# EAGLE board 6820-differential-interface (EAGLE 8.2.2)
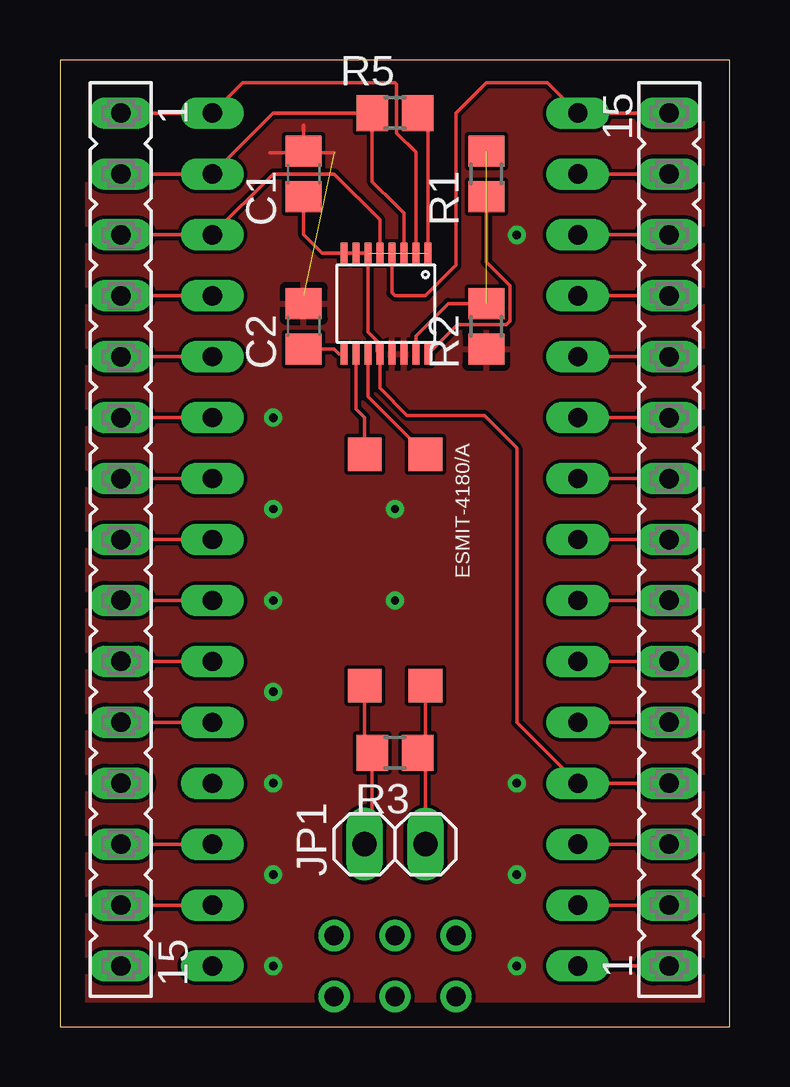
[diagram p0: board, top side]
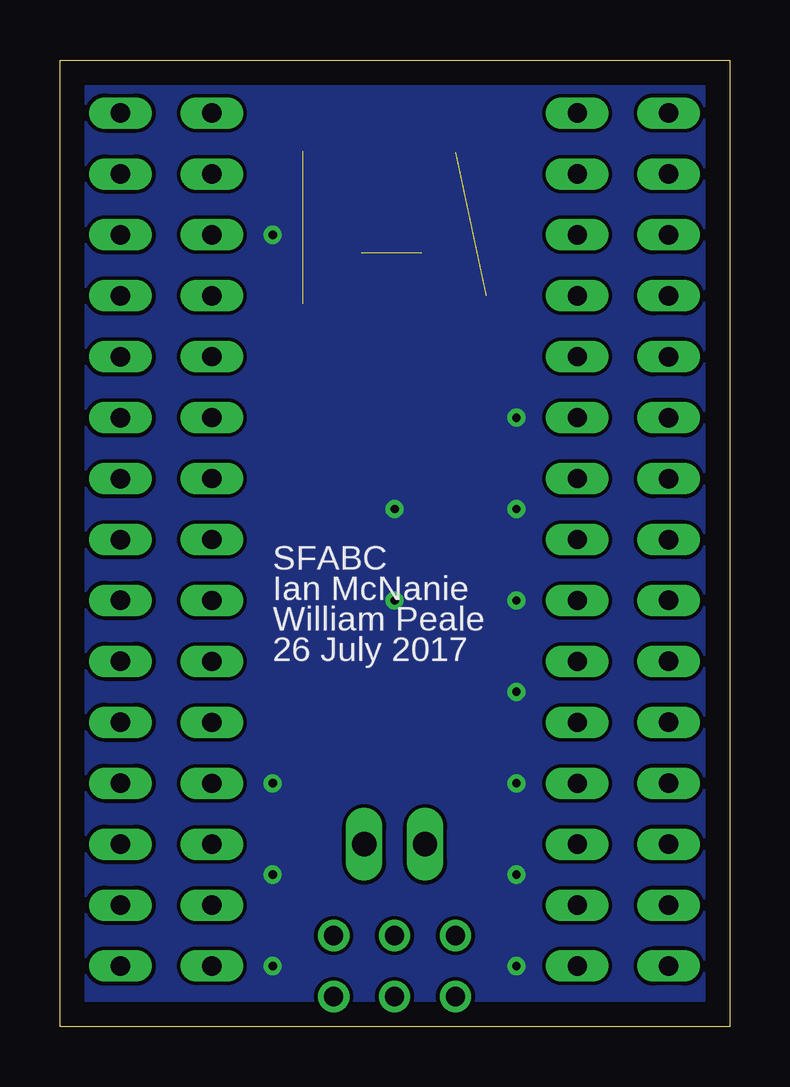
[diagram p1: board, bottom side, seen from below]

Size 27.92 x 40.31 mm. Coordinates in mm from the lower left corner, seen from the top.
Outline: 0,0 27.92,0 27.92,40.31 0,40.31 0,0
Copper layers (1*16): Top 0.035mm / dielectric 1.5mm / Bottom 0.035mm
Design rules "default": minimum track width 6mil, minimum drill 0.35mm, track to track 6mil, track to pad 6mil, pad to pad 6mil, via to via 6mil, smd to smd 6mil, copper to edge 40mil, drill to drill 6mil, minimum pad ring 10mil, minimum via ring 8mil, stop-mask expansion 4mil, vias tented up to drill 0mil, thermal gap 10mil

## Footprints (pad centres in the part's own frame; a part is rotated, then mirrored left to right if it is on the bottom)
C0805 = smd 1.3 x 1.5: 1 -0.95,0; 2 0.95,0
1X02 = drill 1.016 long: 1 -1.27,0; 2 1.27,0
R0805 = smd 1.3 x 1.5: 1 -0.95,0; 2 0.95,0
FE15 = drill 0.813 long: 1 -17.78,0; 2 -15.24,0; 3 -12.7,0; 4 -10.16,0; 5 -7.62,0; 6 -5.08,0; 7 -2.54,0; 8 0,0; 9 2.54,0; 10 5.08,0; 11 7.62,0; 12 10.16,0; 13 12.7,0; 14 15.24,0; 15 17.78,0
NANO = drill 0.8 long: 3.3V -10.16,24.13; 5V -10.16,-1.27; A0 -10.16,19.05; A1 -10.16,16.51; A2 -10.16,13.97; A3 -10.16,11.43; A4 -10.16,8.89; A5 -10.16,6.35; A6 -10.16,3.81; A7 -10.16,1.27; AREF -10.16,21.59; D2 5.08,1.27; D3 5.08,3.81; D4 5.08,6.35; D5 5.08,8.89; D6 5.08,11.43; D7 5.08,13.97; D8 5.08,16.51; D9 5.08,19.05; D10 5.08,21.59; D11 5.08,24.13; D12 5.08,26.67; D13 -10.16,26.67; GND -10.16,-6.35; GND1 5.08,-1.27; RAW -10.16,-8.89; RST -10.16,-3.81; RST1 5.08,-3.81; RX1 5.08,-6.35; TX0 5.08,-8.89 | drill 0.8: ICSP1 -5.08,-10.16; ICSP2 -5.08,-7.62; ICSP3 -2.54,-10.16; ICSP4 -2.54,-7.62; ICSP5 0,-10.16; ICSP6 0,-7.62
MSOP-16 = smd 0.305 x 0.889: 1 -0.1,-0.5; 2 0.4,-0.5; 3 0.9,-0.5; 4 1.4,-0.5; 5 1.9,-0.5; 6 2.4,-0.5; 7 2.9,-0.5; 8 3.4,-0.5; 9 3.4,3.7; 10 2.9,3.7; 11 2.4,3.7; 12 1.9,3.7; 13 1.4,3.7; 14 0.9,3.7; 15 0.4,3.7; 16 -0.1,3.7
ESMIT-4180/A = smd 1.4 x 1.4: 1 -1.27,-4.825; 2 1.27,-4.825; 3 1.27,4.825; 4 -1.27,4.825

## Placement (x,y rotation side)
C1  100nF  [C0805]  10.16,35.56 270 top
C2  100nF  [C0805]  10.16,29.21 90 top
JP1  [1X02]  13.97,7.62 0 top
R1  1.21k  [R0805]  17.78,35.56 90 top
R2  806  [R0805]  17.78,29.21 90 top
R3  [R0805]  13.97,11.43 180 top
R5  5k  [R0805]  13.97,38.1 180 top
SV1  [FE15]  25.4,20.32 90 top
SV2  [FE15]  2.54,20.32 270 top
U$1  NANO  [NANO]  11.43,11.43 0 bottom
U$2  LTC6820  [MSOP-16]  15.24,31.75 180 top
U$3  [ESMIT-4180/A]  13.97,19.05 180 top

## Library data of the parts
C1 C2 R1-R3 R5 = rcl
JP1 = pinhead
SV1 SV2 = con-lsta; OC_FARNELL: unknown; OC_NEWARK: unknown
U$1 = Arduino-clone
U$2 = HyTechDevices
U$3 = cool

## Nets
+5V: C1.2 R5.1 SV1.4 U$1.5V U$2.1 U$2.6 U$2.7 U$2.8 U$2.12
GND: C2.2 R2.1 U$2.13 U$2.14
N$1: R1.1 U$2.16
N$2: R1.2 R2.2 U$2.15
N$3: SV2.1 U$1.D12 U$2.2
N$4: C2.1 U$2.9
N$5: SV1.15 U$1.D13 U$2.4
N$6: R5.2 SV2.2 U$1.D11 U$2.3
N$7: SV1.14 U$1.3.3V
N$8: SV1.13 U$1.AREF
N$9: SV1.12 U$1.A0
N$10: SV1.11 U$1.A1
N$11: SV1.10 U$1.A2
N$12: SV1.9 U$1.A3
N$13: SV2.3 U$1.D10 U$2.5
N$14: SV2.4 U$1.D9
N$15: SV2.5 U$1.D8
N$16: SV2.6 U$1.D7
N$17: SV2.7 U$1.D6
N$18: SV2.8 U$1.D5
N$19: SV2.9 U$1.D4
N$20: SV2.10 U$1.D3
N$21: SV2.11 U$1.D2
N$23: SV2.13 U$1.RST1
N$24: SV2.14 U$1.RX1
N$26: SV1.1 U$1.RAW
N$27: SV1.2 U$1.GND
N$28: SV1.3 U$1.RST
N$29: SV1.5 U$1.A7
N$30: SV1.6 U$1.A6
N$31: SV1.7 U$1.A5
N$32: SV1.8 U$1.A4
N$34: U$2.11 U$3.1
N$35: U$2.10 U$3.2
N$36: JP1.1 R3.2 U$3.3
N$37: JP1.2 R3.1 U$3.4

## Tracks (layer width: path | path; a pad name or v marks a point on that pad's centre or on a via)
+5V  (1 unrouted)
  Top 0.152: U$2.1 15.34,37.68 R5.1 14.74,38.1 | SV1.4 U$1.5V 19.05,12.7 19.05,24.13 17.69,25.49 14.48,25.49 13.34,26.62 U$2.12 13.22,28.17 13.22,28.59 12.84,28.97 U$2.6 U$2.7 U$2.8 10.93,32.25 10.16,33.02 C1.2 9.84,34.29
GND  (via drill 0.35)  (1 unrouted)
  Top 0.152: C2.2 10.16,30.48 | 10.16,36.58 10.16,37.59 | 8.76,36.45 11.43,36.45
  other vias: 8.89,25.4 8.89,21.59 13.97,21.59 13.97,17.78 8.89,13.97 8.89,10.16 8.89,6.35 8.89,2.54 19.05,2.54 19.05,6.35 19.05,10.16 19.05,33.02 8.89,17.78
  pour Top: 0,40.64 27.94,40.64 27.94,0 0,0
  pour Bottom: 0,40.64 27.94,40.64 27.94,0 0,0
N$1
  Top 0.152: R1.1 17.78,31.88 18.76,30.91 18.76,29.41 18.62,29.28 16.57,29.28 U$2.16
N$2  (1 unrouted)
  Top 0.152: R2.2 16.19,30.16 14.84,28.81 U$2.15
N$3
  Top 0.152: SV2.1 U$1.D12 7.62,39.37 13.97,39.37 14.04,39.3 14.04,37.25 14.84,36.46 U$2.2
N$4
  Top 0.152: C2.1 11.43,28.26 11.64,28.05 U$2.9
N$5
  Top 0.152: SV1.15 U$1.D13 20.32,39.37 17.78,39.37 16.51,38.1 16.51,31.75 15.24,30.48 13.97,30.48 13.84,30.61 U$2.4
N$6
  Top 0.152: SV2.2 U$1.D11 8.89,38.1 R5.2 13.02,35.24 14,34.26 | U$2.3 14.34,33.92 14,34.26 | 14,34.26 13.97,34.29
N$7
  Top 0.152: U$1.3.3V SV1.14
N$8
  Top 0.152: U$1.AREF SV1.13
N$9
  Top 0.152: U$1.A0 SV1.12
N$10
  Top 0.152: U$1.A1 SV1.11
N$11
  Top 0.152: SV1.10 U$1.A2
N$12
  Top 0.152: U$1.A3 SV1.9
N$13
  Top 0.152: SV2.3 U$1.D10 8.89,35.56 11.43,35.56 13.34,33.65 U$2.5 13.34,32.67
N$14
  Top 0.152: SV2.4 U$1.D9
N$15
  Top 0.152: SV2.5 U$1.D8
N$16
  Top 0.152: SV2.6 U$1.D7
N$17
  Top 0.152: SV2.7 U$1.D6
N$18
  Top 0.152: SV2.8 U$1.D5
N$19
  Top 0.152: SV2.9 U$1.D4
N$20
  Top 0.152: SV2.10 U$1.D3
N$21
  Top 0.152: SV2.11 U$1.D2
N$23
  Top 0.152: SV2.13 U$1.RST1
N$24
  Top 0.152: SV2.14 U$1.RX1
N$26
  Top 0.152: U$1.RAW SV1.1
N$27
  Top 0.152: U$1.GND SV1.2
N$28
  Top 0.152: U$1.RST SV1.3
N$29
  Top 0.152: U$1.A7 SV1.5
N$30
  Top 0.152: SV1.6 U$1.A6
N$31
  Top 0.152: U$1.A5 SV1.7
N$32
  Top 0.152: SV1.8 U$1.A4
N$34
  Top 0.152: U$2.11 12.84,26.27 U$3.1
N$35
  Top 0.152: U$2.10 12.34,25.76 12.7,25.4 U$3.2
N$36
  Top 0.152: U$3.3 12.7,11.75 R3.2 13.02,7.94 JP1.1
N$37
  Top 0.152: U$3.4 15.24,11.75 14.99,11.5 | 14.99,11.5 R3.1 | JP1.2 15.24,11.25 14.99,11.5

## Text on the board
bNames: SFABC | Ian McNanie | William Peale | 26 July 2017